# Altium PCB BM43112DC02_PIJIAKUN_PCB.PcbDoc
Units mm, origin at the board's own origin, x right, y up, seen from the top; angles counter-clockwise.
Board outline 16.36 x 15.97 mm, 4 copper layers (Top Layer 1, POWER, GND, Bottom Layer 1), stack 0.745 mm thick; 65 components, 36 nets, 235 pads, 55 vias.
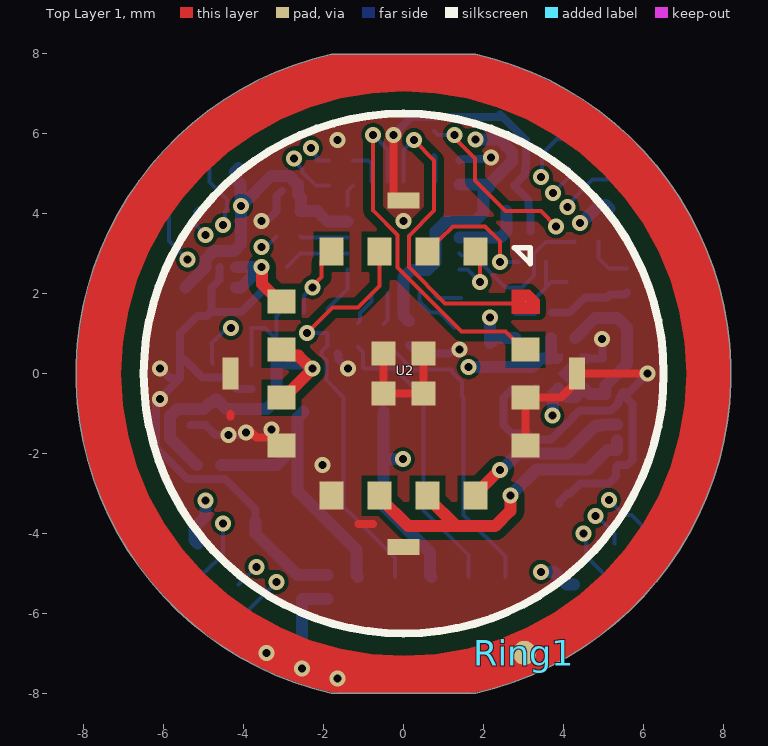
[diagram p0: Top Layer 1 view]
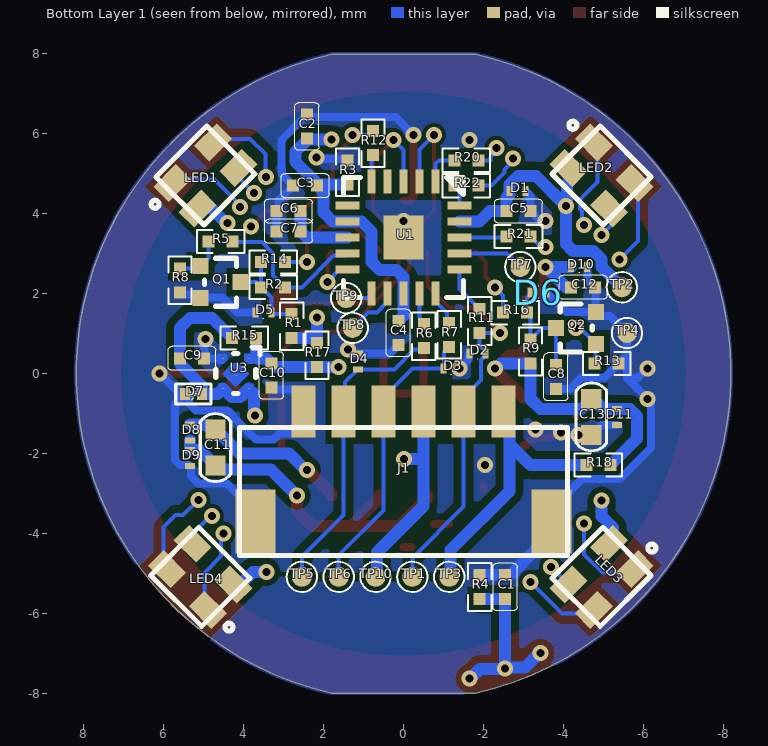
[diagram p1: Bottom Layer 1 view, seen from below]
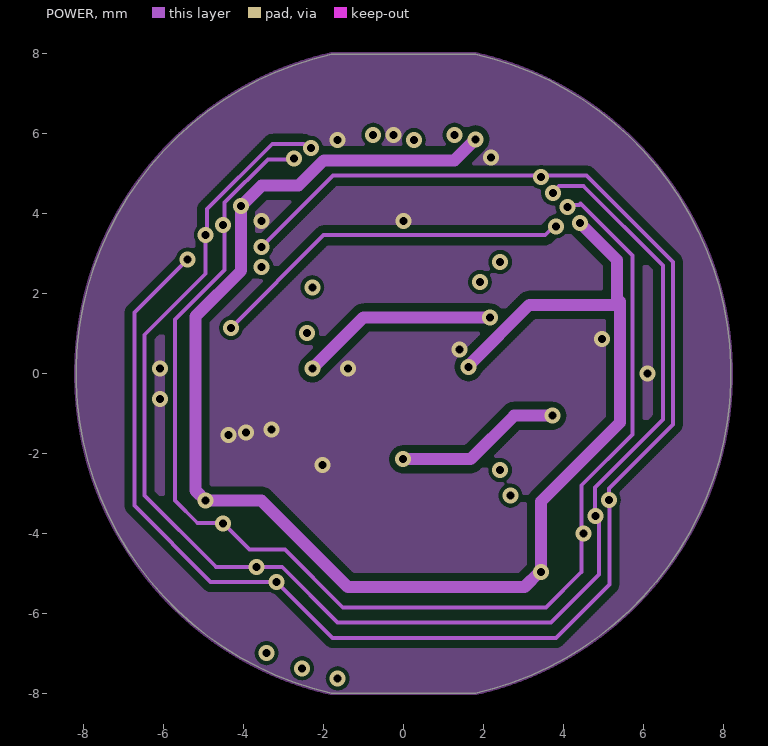
[diagram p2: POWER]
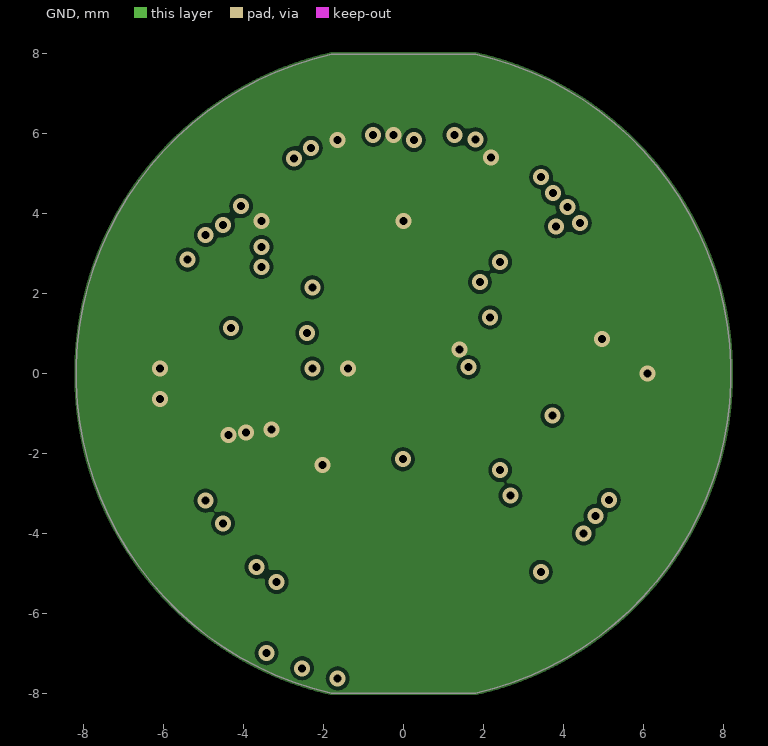
[diagram p3: GND]
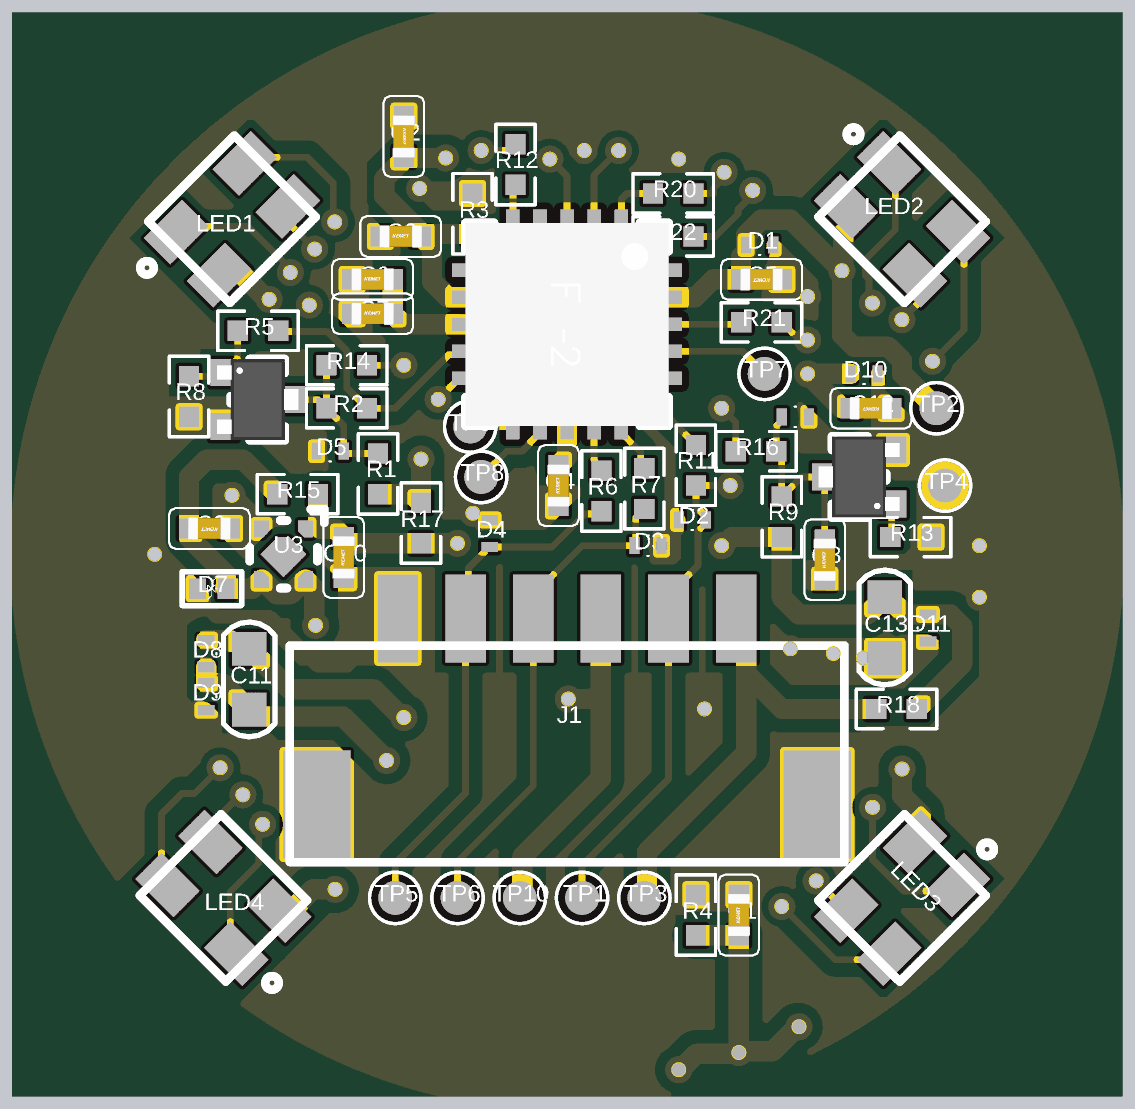
[diagram p4: 3D render of the assembled board from below, using the file's embedded part models]

## Layer stack, top to bottom
Top Solder: solder mask 0.0102, Solder Resist, Dk 3.5
Top Layer 1: signal copper 0.035
Dielectric 2: prepreg 0.0711, PP-006, Dk 4.1
POWER: signal copper 0.035
Dielectric 3: prepreg 0.0711, PP-006, Dk 4.1
Dielectric 1: dielectric 0.32, FR-4, Dk 4.8
Dielectric 4: prepreg 0.0711, PP-006, Dk 4.1
GND: signal copper 0.035
Dielectric 5: prepreg 0.0711, PP-006, Dk 4.1
Bottom Layer 1: signal copper 0.035
Bottom Solder: solder mask 0.0102, Solder Resist, Dk 3.5

## Board outline
-1.803,-7.987 cw(c-0.001,0) -1.803,7.987 1.794,7.987 cw(c-0.008,0) 1.794,-7.987

## Design rules (kind name [scope] priority, off if disabled: settings)
BoardOutlineClearance [All] p1: gap=0 ignorepadtopadclearanceinfootprint=FALSE
Clearance [All] p1: gap=0.1 ignorepadtopadclearanceinfootprint=FALSE except(0.15: SMDPad-Fill SMDPad-Poly SMDPad-Region; 0.2: Arc-Fill Arc-Poly Arc-Region Track-Fill Track-Poly Track-Region; 0.5: Fill-Fill Fill-Poly Fill-Region Poly-Poly Poly-Region Region-Region)
HoleToHoleClearance [All] p1: gap=0 allowstackedmicrovias=TRUE
MinimumSolderMaskSliver [All] p1: minsoldermaskwidth=0
PolygonConnect [All] p1: connectstyle=Direct reliefconductorwidth=0.254 reliefentries=4 polygonreliefangle="90 Angle" airgapwidth=0
RoutingVias [All] p1: holewidth=0.711 width=1.27 viastyle="Through Hole" minholewidth=0.711 minwidth=1.27 maxholewidth=0.711 maxwidth=1.27
SilkToSilkClearance SilkToSilkClearance_1 [All] p1: silktosilkclearance=0
SilkToSolderMaskClearance [IsPad] p1: minsilkscreentomaskgap=0 clearancetoexposedcopper=TRUE
SolderMaskExpansion [All] p1: expansion=0.102 istentingtop=FALSE
Width [All] p1: maxlimit=1 minlimit=0.1 preferedwidth=0.1
26 further rules are at their usual default settings.

## Components (designator, comment, footprint, x,y, rotation, side; value= is the part's Value field where it differs from the comment)
C1 "2.2nF,25V,10%,村田" C0201 -2.54,-5.334 r90 bottom
C2 "2.2uF,10V,20%,太诱" C0201 2.413,6.177 r270 bottom
C3 "0.1uF,16V,10%,村田" C0201 2.459,4.699 r180 bottom
C4 "0.1uF,16V,10%,村田" C0201 0.127,1.016 r90 bottom
C5 "0.1uF,16V,10%,村田" C0201 -2.875,4.064 r0 bottom
C6 "2.2uF,10V,20%,太诱" C0201 2.875,4.064 r180 bottom
C7 "0.1uF,16V,10%,村田" C0201 2.875,3.556 r180 bottom
C8 "47nF,16V,10%,村田" C0201 -3.81,-0.081 r90 bottom
C9 "2.2uF,10V,20%,太诱" C0201 5.288,0.381 r0 bottom
C10 "0.1uF,16V,10%,村田" C0201 3.302,-0.046 r90 bottom
C11 "2.2uF,10V,20%,太诱" CC0402-M 4.699,-1.847 r270 bottom
C12 "2.2nF,25V,10%,村田" C0201 -4.491,2.159 r0 bottom
C13 "2.2uF,10V,20%,太诱" CC0402-M -4.699,-1.085 r90 bottom
D1 "PT4CR3V3NE" SOD-962 -2.848,4.572 r0 bottom
D2 "PT4CR3V3NE" SOD-962 -1.851,0.508 r180 bottom
D3 "PT4CR3V3NE" SOD-962 -1.197,0.127 r0 bottom
D4 "PT4CR3V3NE" SOD-962 1.143,0.308 r270 bottom
D5 "PT4CR3V3NE" SOD-962 3.502,1.524 r180 bottom
D6 "PT4CR3V3NE" SOD-962 -3.375,2.032 r0 bottom
D7 "PT4C051V" "DFN0603-2L 0.3*0.23 Pitch 0.38" 5.251,-0.508 r180 bottom
D8 "PT4CR3V3NE" SOD-962 5.334,-1.47 r270 bottom
D9 "PT4C121V" SOD-962 5.334,-2.105 r270 bottom
D10 "PT4C121V" SOD-962 -4.391,2.667 r180 bottom
D11 "PT4CR3V3NE" SOD-962 -5.334,-1.089 r90 bottom
J1 "Connector 6 Pins" CON6_10 0,-0.95 r0 bottom locked
LED1 "TZL-13-063RGB/NC" S1615RGB 4.953,4.953 r315 bottom
LED2 "TZL-13-063RGB/NC" S1615RGB -4.953,4.953 r45 bottom
LED3 "TZL-13-063RGB/NC" S1615RGB -4.953,-5.08 r135 bottom
LED4 "TZL-13-063RGB/NC" S1615RGB 5.08,-5.08 r225 bottom
Q1 "SXSC568R//NC" SOT-723 4.572,2.286 r270 bottom
Q2 "SXSC568R" SOT-723 -4.318,1.143 r90 bottom
R1 "10KΩ,5%" R0201 2.794,1.189 r270 bottom
R2 "100Ω,5%" R0201 3.256,2.159 r0 bottom
R3 "10KΩ,5%" R0201 1.397,5.034 r270 bottom
R4 "0Ω,5%" R0201 -1.905,-5.334 r270 bottom
R5 "2.2KΩ,5%//NC" R0201 4.569,3.304 r0 bottom
R6 "100Ω,5%" R0201 -0.508,0.935 r90 bottom
R7 "100Ω,5%" R0201 -1.143,0.97 r90 bottom
R8 "10KΩ,5%//NC" R0201 5.588,2.332 r270 bottom
R9 "10KΩ,5%" R0201 -3.175,0.554 r270 bottom
R11 "330Ω,5%" R0201 -1.905,1.316 r90 bottom
R12 "2.2KΩ,5%" R0201 0.762,5.761 r90 bottom
R13 "10KΩ,5%" R0201 -5.08,0.254 r180 bottom
R14 "1KΩ,5%" R0201 3.256,2.794 r0 bottom
R15 "0Ω,5%//NC" R0201 3.983,0.889 r180 bottom
R16 "1KΩ,5%" R0201 -2.794,1.524 r180 bottom
R17 "0Ω,5%//NC" R0201 2.159,0.462 r90 bottom
R18 "0Ω,5%" R0201 -4.872,-2.286 r180 bottom
R20 "47R/NC" R0201 -1.57,5.334 r180 bottom
R21 "47R/NC" R0201 -2.875,3.429 r0 bottom
R22 "100R/NC" R0201 -1.57,4.699 r0 bottom
Ring1 "Ring" Ring 0,0 r0 top locked
TP1 "TP" TP（Φ0.5） -0.222,-5.08 r90 bottom
TP2 "TP" TP（Φ0.5） -5.461,2.159 r90 bottom
TP3 "TP" TP（Φ0.5） -1.143,-5.08 r90 bottom
TP4 "TP" TP（Φ0.5） -5.588,1.016 r90 bottom
TP5 "TP" TP（Φ0.5） 2.54,-5.08 r90 bottom
TP6 "TP" TP（Φ0.5） 1.619,-5.08 r90 bottom
TP7 "TP" TP（Φ0.5） -2.921,2.667 r90 bottom
TP8 "TP" TP（Φ0.5） 1.27,1.143 r90 bottom
TP9 "TP" TP（Φ0.5） 1.432,1.889 r90 bottom
TP10 "TP" TP（Φ0.5） 0.699,-5.08 r90 bottom
U1 "ACM32FP421FIU6" "QFN 20 3*3 Pitch 0.4" 0,3.4 r270 bottom
U2 "BF83112DW7&D_7&F_4" BF83112DW7&D_7&F_4 0,0 r0 top locked
U3 "LP3997-33QVF" "DFN 1*1-4L" 4.191,0 r0 bottom

## Footprints (in the part's own frame and the unit in brackets; to place one, negate y for a bottom-side part, rotate by r counter-clockwise, add the part's x,y. Pads: shape width x height; smd on the part's side, far side on the other; paste and mask are expansions set on the pad)
BF83112DW7&D_7&F_4 [mm]
  round 0.025 smd: 1(3.05,1.8)
  rect 0.7x0.6 smd: 2(3.05,0.6) 3(3.05,-0.6) 4(3.05,-1.8) 9(-3.05,-1.8) 10(-3.05,-0.6) 11(-3.05,0.6) 12(-3.05,1.8)
  rect 0.6x0.7 smd: 5(1.8,-3.05) 6(0.6,-3.05) 7(-0.6,-3.05) 8(-1.8,-3.05) 13(-1.8,3.05) 14(-0.6,3.05) 15(0.6,3.05) 16(1.8,3.05)
  rect 0.6x0.6 smd: 17(0.5,0.5) 18(0.5,-0.5) 19(-0.5,0.5) 20(-0.5,-0.5)
  rect 0.4x0.8 smd: 21(4.33,0) 23(-4.33,0)
  rect 0.8x0.4 smd: 22(0,-4.33) 24(0,4.33)
  round 0.1 on Mech13: ""(0.15,0.15)
  Top Layer 1 region: 2.7,1.5 2.7,2.1 3.15,2.1 3.4,1.85 3.4,1.5
  silkscreen extent -6.5,-6.5 6.5,6.5
C0201 [mm]
  rect 0.3x0.3 smd mask+0.051: 1(-0.3,0) 2(0.3,0)
  round 0.05 on Mech15: ""(0,0)
  silkscreen extent -0.6,-0.3 0.6,0.3, body extent -0.31,-0.17 0.32,0.16, height 0.37
CC0402-M [mm]
  rect 0.5x0.51 smd mask+0.051: 1(-0.45,0) 2(0.45,0)
  silkscreen extent -0.85,-0.38 0.85,0.38
CON6_10 [mm]
  rect 0.6x1.3 smd mask+0.051: 1(2.5,0) 2(1.5,0) 3(0.5,0) 4(-0.5,0) 5(-1.5,0) 6(-2.5,0)
  rect 1x1.6 smd mask+0.051: A(-3.7,2.75) B(3.7,2.75)
  silkscreen extent -4.1,0.4 4.1,3.6
"DFN0603-2L 0.3*0.23 Pitch 0.38" [mm]
  rect 0.25x0.3 smd mask+0.051: 1(-0.21,0) 2(0.21,0)
  silkscreen extent -0.44,-0.25 0.44,0.25
"DFN 1*1-4L" [mm]
  round 0.025 smd mask+0.051: 1(-0.325,-0.375) 2(0.325,-0.375) 3(0.325,0.375) 4(-0.325,0.375) A(0,0.042)
  round 0.05 on Mech15: ""(0,0)
  Top Layer 1 region: 0.302,0.25 0.215,0.337 0.215,0.5 0.435,0.5 0.435,0.25
  Top Layer 1 region: -0.435,-0.5 -0.215,-0.5 -0.215,-0.337 -0.302,-0.25 -0.435,-0.25
  Top Layer 1 region: -0.435,0.25 -0.302,0.25 -0.215,0.337 -0.215,0.5 -0.435,0.5
  Top Layer 1 region: 0.215,-0.5 0.215,-0.337 0.302,-0.25 0.435,-0.25 0.435,-0.5
  Top Layer 1 region: -0.085,-0.255 -0.339,0 0,0.339 0.339,0 0.085,-0.255
  silkscreen extent -0.6,-0.67 0.5,0.5, body extent -0.5,-0.5 0.5,0.5, height 0.59
"QFN 20 3*3 Pitch 0.4" [mm]
  rect 0.6x0.2 smd: 1(-1.4,0.8) 2(-1.4,0.4) 3(-1.4,0) 4(-1.4,-0.4) 5(-1.4,-0.8) 11(1.4,-0.8) 12(1.4,-0.4) 13(1.4,0) 14(1.4,0.4) 15(1.4,0.8)
  rect 0.2x0.6 smd: 6(-0.8,-1.4) 7(-0.4,-1.4) 8(0,-1.4) 9(0.4,-1.4) 10(0.8,-1.4) 16(0.8,1.4) 17(0.4,1.4) 18(0,1.4) 19(-0.4,1.4) 20(-0.8,1.4)
  rect 1.1x1 smd: A(0,0)
  round 0.1 on Mech15: ""(0,0)
  silkscreen extent -1.5,-1.5 1.5,1.5, body extent -1.5,-1.5 1.5,1.5, height 0.65
R0201 [mm]
  rect 0.3x0.3 smd mask+0.051: 1(-0.3,0) 2(0.3,0)
  round 0.05 on Mech15: ""(0,0)
  silkscreen extent -0.6,-0.29 0.6,0.29, body extent -0.3,-0.15 0.3,0.15, height 0.27
Ring [mm] "直径0.4mm"
  round 0.6 smd mask+0.102: 1(3.016,-6.98)
  Top Layer 1 region: 1.798,7.971 1.798,7.971 1.798,7.971 2.374,7.827 3.13,7.556 3.855,7.213 4.544,6.8 5.189,6.322 5.783,5.783 6.322,5.189 6.8,4.544 7.213,3.855 7.556,3.13 7.827,2.374 8.022,1.596 8.139,0.802 8.179,0 8.139,-0.802 8.022,-1.596 7.827,-2.374 7.556,-3.13 7.213,-3.855 6.8,-4.544 6.322,-5.189 5.783,-5.783 5.189,-6.322 4.544,-6.8 3.855,-7.213 3.13,-7.556 2.374,-7.827 1.798,-7.971 1.798,-7.971 1.798,-7.971 1.672,-7.98 -1.667,-7.98 -1.792,-7.971 -1.792,-7.971 -1.792,-7.971 -2.368,-7.827 -3.123,-7.556 -3.849,-7.213 -4.537,-6.8 -5.182,-6.322 -5.777,-5.783 -6.316,-5.189 -6.794,-4.544 -7.206,-3.855 -7.55,-3.13 -7.82,-2.374 -8.015,-1.596 -8.133,-0.802 -8.172,0 -8.133,0.802 -8.015,1.596 -7.82,2.374 -7.55,3.13 -7.206,3.855 -6.794,4.544 -6.316,5.189 -5.777,5.783 -5.182,6.322 -4.537,6.8 -3.849,7.213 -3.123,7.556 -2.368,7.827 -1.792,7.971 -1.792,7.971 -1.792,7.971 -1.665,7.98 1.674,7.98 hole: 0,7.057 -0.79,7.013 -1.57,6.881 -2.331,6.661 -3.062,6.359 -3.755,5.976 -4.4,5.518 -4.99,4.99 -5.518,4.4 -5.976,3.755 -6.359,3.062 -6.661,2.331 -6.881,1.57 -7.013,0.79 -7.057,0 -7.013,-0.79 -6.881,-1.57 -6.661,-2.331 -6.359,-3.062 -5.976,-3.755 -5.518,-4.4 -4.99,-4.99 -4.4,-5.518 -3.755,-5.976 -3.062,-6.359 -2.331,-6.661 -1.57,-6.881 -0.79,-7.013 0,-7.057 0.79,-7.013 1.57,-6.881 2.331,-6.661 3.062,-6.359 3.755,-5.976 4.4,-5.518 4.99,-4.99 5.518,-4.4 5.976,-3.755 6.359,-3.062 6.661,-2.331 6.881,-1.57 7.013,-0.79 7.057,0 7.013,0.79 6.881,1.57 6.661,2.331 6.359,3.062 5.976,3.755 5.518,4.4 4.99,4.99 4.4,5.518 3.755,5.976 3.062,6.359 2.331,6.661 1.57,6.881 0.79,7.013
S1615RGB [mm]
  rect 0.8x0.55 smd mask+0.051: 1(0.72,-0.45) 2(-0.72,-0.45) 3(0.72,0.45) 4(-0.72,0.45)
  silkscreen extent -0.9,-0.85 1.5,0.85
SOD-962 [mm] "类似0201"
  rect 0.15x0.25 smd mask+0.051: 1(-0.2,0) 2(0.2,0)
  round 0.05 on Mech15: ""(0,0)
  silkscreen extent -0.01,-0.15 0.01,0.15, body extent -0.3,-0.15 0.3,0.15, height 0.37
SOT-723 [mm]
  rect 0.4x0.4 smd mask+0.051: 1(-0.4,-0.5) 2(0.4,-0.5) 3(0,0.5)
  round 0.1 on Mech15: ""(0,0)
  silkscreen extent -0.6,-0.4 0.6,0.4, body extent -0.6,-0.6 0.6,0.6, height 0.59
TP（Φ0.5） [mm]
  round 0.5 smd: 1(0,0)
  round 0.1 on Mech15: ""(0,0)
  silkscreen extent -0.38,-0.38 0.38,0.38

## Part data
C1 C2 C3 C4 C5 C6 C7 C8 C9 C10 C11 C12 C13: library part Cap, "贴片电容", supplier=深圳市扬盛达科技有限公司
  C1 C12: Material code=3040100000019
  C2 C6 C9 C11 C13: Material code=3040000000063
  C3 C4 C5 C7 C10: Material code=3040100000012
  C8: Material code=3040100000024
D1 D2 D3 D4 D5 D6 D7 D8 D11: library part ESD, "双向静电二极管", supplier=深圳市玛珂斯科技有限公司
  D1 D2 D3 D4 D5 D6 D8 D11: Material code=3160100000178
  D7: Material code=3160100000174
D9 D10: library part TVS, "双向瞬态抑制二极管", Material code=3160100000173, supplier=深圳市玛珂斯科技有限公司
J1: "连接器", supplier=深圳市富美康电子有限公司
LED1 LED2 LED3 LED4: library part TZL-13-063RGB, PCB DECAL=S1615RGB
Q1 Q2: library part "NPN BCE", "NPN型三极管", Material code=3160100000013, supplier=深圳市扬盛达科技有限公司
R1 R2 R3 R4 R5 R6 R7 R8 R9 R11 R12 R13 R14 R15 R16 R17 R18: library part RES, "贴片电阻", supplier=深圳市扬盛达科技有限公司
  R1 R3 R8 R9 R13: Material code=3050000000004
  R2 R6 R7: Material code=3050000000018
  R4 R15 R17 R18: Material code=3050000000061
  R5 R12: Material code=3050000000006
  R11: Material code=3050000000007
  R14 R16: Material code=3050000000003
R20 R21 R22: library part R0201, "RES S 0402 5.1Ω J 1/16W", Module=0, Part_Name="RES 0402 +-5%", Part_Number=3.0109.06100, Part_Type="Chip Resistor\General\0402\RoHS", PCB DECAL=0201, PCB_DECAL=R0603, Process=SMT, Source_Path="Z:\CULTRAVIEW CIS.OLB", Specification=spec
Ring1: "金属环", supplier=深圳市添营精密科技有限公司&东莞市飞佳五金有限公司&东莞市盟展五金科技有限公司
TP1 TP2 TP3 TP4 TP5 TP6 TP7 TP8 TP9 TP10: "非正常物料无需采购", Material code=无, supplier=非正常物料线路板厂会做好的
U1: library part ACM32FP421, "微控制单元", Material code=3350000000037, supplier=上海航芯电子科技股份有限公司
U2: "电容按压式指纹识别芯片", supplier=深圳贝特莱电子科技股份有限公司
U3: library part "LDO 4 Pins", "线性稳压器", supplier=深圳市思派德科技有限公司

## Via types
v1: diameter 0.4, hole 0.2, Top Layer 1 to Bottom Layer 1, tented both sides, 55 vias

## Nets (pads, with @x,y where several pads share a name; then routed paths per layer and width w, separated by ;. In a path a pad name is that pad's centre, name@x,y a point inside that pad or via, vN(x,y) a via of type N, cw(c..) or ccw(c..) an arc to the next point about the centre after c; other vN are vias at no path point)
5V: C9.2 D7.2 J1.4 R15.1 TP10.1 U3.3 U3.4 | length 14.9
  POWER w0.3: v1(-0.019,-2.14) 1.67,-2.14 2.759,-1.051 v1(3.718,-1.051)
  Bottom Layer 1 w0.3: J1.4 -0.5,-2.13 ; v1(-0.019,-2.14) -0.34,-2.14 -0.35,-2.13 -0.5,-2.13 ; TP10.1 0.66,-5.042 0.66,-4.47 -0.5,-3.31 -0.5,-2.13 ; v1(3.718,-1.051) 3.737,-1.032 3.737,-0.504 U3.4 ; 3.901,-0.403 4.087,-0.589 4.295,-0.589 4.509,-0.375 U3.3 4.649,-0.508 D7.2 5.041,-0.299 5.588,0.248 5.588,1.143 5.334,1.397 4.791,1.397 R15.1
BOOT: TP7.1 U1.17 | length 1.7
  Bottom Layer 1 w0.1: TP7.1 -2.588,3 U1.17
ESD-GND: C1.1 R4.2 Ring1.1 | length 4.4
  Bottom Layer 1 w0.3: v1(-3.429,-6.985) -3.402,-6.985 -3.04,-7.347 -2.559,-7.347 v1(-2.54,-7.366) ; R4.2 C1.1 v1(-2.54,-7.366) ; v1(-1.651,-7.62) -1.678,-7.62 -1.913,-7.385 -2.521,-7.385 v1(-2.54,-7.366)
FP_INT: D2.2 J1.5 R11.1 TP1.1 U2.14 | length 10.6
  Top Layer 1 w0.1: v1(-2.413,1.016) -1.778,1.651 -1.143,1.651 -0.6,2.194 U2.14
  Bottom Layer 1 w0.1: v1(-2.413,1.016) R11.1 -1.905,0.704 -2.051,0.558 -2.051,0.458 -1.936,0.343 -1.936,-0.164 -1.5,-0.6 J1.5 -1.5,-3.326 -0.222,-4.604 TP1.1
FVDD: C11.1 D8.1 U2.5 | length 4.3
  Top Layer 1 w0.3: U2.5 1.8,-3 2.387,-2.413 v1(2.413,-2.413)
  Bottom Layer 1 w0.3: v1(2.413,-2.413) 2.44,-2.413 2.856,-1.997 4.094,-1.997 4.694,-1.397 C11.1 4.799,-1.297 4.953,-1.297 4.98,-1.27 D8.1
FVSS: C11.2 D8.2 D9.1 U2.6 U2.7 | length 8.6
  Top Layer 1 w0.3: U2.7 -0.6,-3.1 0.11,-3.81 1.31,-3.81 ; U2.6 0.6,-3.1 1.31,-3.81 ; v1(2.667,-3.048) 2.667,-3.429 2.286,-3.81 1.31,-3.81
  Bottom Layer 1 w0.3: v1(2.667,-3.048) 3.318,-2.397 4.604,-2.397 5.096,-1.905 D9.1 D8.2
GND: C1.2 C2.1 C3.1 C4.1 C5.1 C6.1 C7.1 C8.1 C9.1 C10.1 C12.1 C13.1 D1.1 D2.1 D3.1 D4.1 D5.1 D6.1 D7.1 D9.2 D10.2 D11.1 J1.1 J1.A J1.B Q1.2 Q2.2 R3.1 R4.1 R8.2 R13.2 TP4.1 U1.A U2.3 U2.4 U2.8 U2.9 U2.17 U2.18 U2.19 U2.20 U2.21 U2.22 U2.23 U2.24 U3.2 | length 51.8
  Top Layer 1 w0.2: -4.33,-1.004 -4.327,-1.007 -4.327,-1.076 ; v1@-3.937,-1.397 -3.883,-1.397 -3.68,-1.6 -3.25,-1.6 U2.9 U2.9@-3,-1.8 ; U2.8@-2,-2.9 U2.8@-2,-2.8 ; -1.135,-3.765 -0.765,-3.765 ; U2.19 U2.20 U2.18 U2.17 ; v1(-0.254,5.969) -0.254,4.43 -0.154,4.33 U2.24 ; U2.22@-0.2,-4.33 U2.22 ; U2.4 U2.3 3.93,-0.6 4.33,-0.2 U2.21 v1(6.096,0)
  Bottom Layer 1 w0.2: v1(-6.096,0.127) -5.858,-0.111 -5.588,-0.111 ; D11.1 -4.95,-1.289 -4.704,-1.535 C13.1 -4.06,-1.535 -3.991,-1.466 v1(-3.937,-1.466) ; D10.2 -4.603,2.655 -4.603,2.347 C12.1 -4.805,2.145 -4.805,1.557 Q2.2 ; C8.1 -4.165,-0.381 -4.45,-0.096 -5.03,-0.096 R13.2 -5.588,0.462 ; J1.A -3.7,-3.4 -4.464,-2.636 -5.405,-2.636 -6.192,-1.849 -6.192,-0.715 -5.588,-0.111 ; D6.1 -4.064,1.543 Q2.2 ; v1(-3.556,3.81) -3.518,3.848 -3.391,3.848 C5.1 -3.175,4.445 D1.1 ; D2.1 -1.626,0.483 -1.626,0.356 v1(-1.397,0.127) ; v1(-0.254,5.969) 0.188,6.411 C2.1@2.413,6.411 ; C4.1 0.335,0.508 D4.1 1.168,0.533 1.264,0.533 1.338,0.607 v1(1.392,0.607) ; R3.1 1.434,5.371 2.141,5.371 v1(2.178,5.408) ; C2.1 3.054,5.836 3.054,5.152 3.035,5.133 3.035,4.975 C3.1 3.125,4.333 3.125,4.114 C6.1 C7.1 ; C10.1 3.248,-0.4 2.7,-0.4 2.5,-0.6 J1.1 2.5,-1.3 2.7,-1.5 3.1,-1.5 3.247,-1.647 3.687,-1.647 4.244,-1.09 4.244,-1.064 4.361,-0.947 4.387,-0.947 4.414,-0.92 5.187,-0.92 5.366,-0.741 5.366,-0.678 5.391,-0.653 5.391,-0.603 5.436,-0.558 5.436,-0.533 D7.1 5.461,-0.483 5.486,-0.458 5.638,-0.458 v1(6.096,0) ; D5.1 4.147,1.524 4.528,1.905 5.053,1.905 Q1.2 5.168,1.982 5.538,1.982 R8.2 ; J1.B@3.9,-3.259 3.9,-3.2 4.1,-3 4.159,-3 4.412,-2.747 5.127,-2.747 5.309,-2.565 5.309,-2.33 D9.2 ; U3.2 4.522,0.381 C9.1 4.971,0.399 4.971,0.854 v1(4.953,0.871) ; D9.2@5.319,-2.32 5.359,-2.28 5.594,-2.28 5.715,-2.159 5.715,-0.762 5.511,-0.558 5.486,-0.558 D7.1@5.461,-0.533 ; -5.588,-0.111 -5.588,0.462 ; -5.588,0.462 TP4.1 -5.161,1.443 -4.918,1.443 Q2.2
  Bottom Layer 1 w0.3: J1.A -3.7,-4 -2.666,-5.034 C1.2 R4.1
  other v1: -2.032,-2.286 -4.38,-1.535 -3.302,-1.397 -6.096,-0.635 0,3.81 -1.651,5.842
HVDD: C12.2 D10.1 U2.12 | length 2.6
  Top Layer 1 w0.3: v1(-3.556,2.667) -3.537,2.648 -3.537,2.237 -3.1,1.8 U2.12
  Bottom Layer 1 w0.3: C12.2 -4.064,2.159 v1(-3.556,2.667) D10.1
INT: R11.2 U1.16 | length 1.2
  Bottom Layer 1 w0.1: R11.2 -1.4,2.121 U1.16
LED_B: R20.1 U1.1 | length 1
  Bottom Layer 1 w0.1: R20.1 -0.889,5.334 -0.805,5.25 -0.805,4.805 U1.1
LED_G: R21.2 U1.18 | length 1.2
  Bottom Layer 1 w0.1: R21.2 -2.546,3.4 U1.18
LED_R: R22.2 U1.20 | length 0.6
  Bottom Layer 1 w0.1: U1.20 -1.4,4.569 R22.2
MCU3_3V: C2.2 C3.2 C4.2 C5.2 C10.2 D1.2 LED1.3 LED2.3 LED3.3 LED4.3 R3.2 R15.2 R17.1 TP2.1 U1.7 U1.13 U1.19 U3.1 | length 59.7
  POWER w0.3: v1(1.621,0.162) 1.621,0.189 1.671,0.239 1.671,0.249 3.142,1.72 5.334,1.72 ; v1(1.794,5.858) 1.27,5.334 -1.998,5.334 -2.633,4.699 -3.556,4.699 v1(-4.064,4.191) -4.064,2.575 -5.207,1.432 -5.207,-2.921 v1(-4.953,-3.175) -3.556,-3.175 -1.397,-5.334 3.021,-5.334 3.402,-4.953 v1(3.429,-4.953) 3.429,-3.201 5.403,-1.227 5.403,1.8 5.334,1.869 5.334,2.839 v1(4.404,3.769)
  Bottom Layer 1 w0.3: TP2.1 -4.953,2.667 -4.953,2.859 -4.745,3.067 -4.24,3.067 -4.064,3.243 v1(-4.064,4.191) ; LED3.3 -5.232,-4.164 -5.232,-3.846 -4.953,-3.567 v1(-4.953,-3.175) ; LED2.3 -4.214,5.056 -4.214,4.879 -4.083,4.748 -4.083,4.21 v1(-4.064,4.191) ; U1.19 -1.895,3.8 -2.159,4.064 C5.2 -2.573,4.066 -2.573,4.403 -2.648,4.478 D1.2 -2.648,4.726 -2.869,4.947 -3.308,4.947 v1(-4.064,4.191) ; C4.2 0,1.443 U1.13 0,2.412 0.176,2.587 0.591,2.587 0.794,2.79 0.794,3.547 1.046,3.8 U1.7 1.764,3.8 1.997,4.033 1.997,4.537 C3.2 ; R3.2 2.124,4.734 C3.2 ; v1(1.621,0.162) R17.1 3.21,0.162 C10.2 3.423,0.375 3.645,0.375 3.683,0.413 R15.2 ; v1(1.794,5.858) 2.394,5.858 C2.2 2.413,5.837 2.704,5.546 2.704,5.297 2.159,4.753 C3.2 ; v1(3.429,-4.953) 3.758,-4.953 4.076,-5.271 LED4.3 ; v1(4.404,3.769) 4.423,3.788 4.456,3.788 4.881,4.212 4.879,4.214 5.056,4.214 LED1.3
NetLED1_1: LED1.1 LED2.1 LED3.1 LED4.1 R22.1 | length 42.5
  POWER w0.1: v1(-4.517,-3.741) -5.15,-3.74 -5.715,-3.175 -5.715,1.348 -4.476,2.587 -4.476,3.675 v1(-4.514,3.713) ; v1@-4.515,-3.74 -3.856,-4.399 -2.967,-4.399 -1.524,-5.842 3.556,-5.842 4.445,-4.953 v1@4.445,-3.992 ; v1@-4.476,3.713 -4.476,4.274 -3.398,5.352 -2.771,5.352 v1(-2.744,5.379) ; v1(4.091,4.165) 4.149,4.222 4.393,4.222 4.419,4.248 5.715,2.953 5.715,-1.518 4.443,-2.791 4.443,-3.935 4.473,-3.965 v1(4.5,-3.992)
  Bottom Layer 1 w0.1: LED3.1 -5.692,-4.977 -4.977,-4.977 -4.517,-4.517 v1(-4.517,-3.741) ; LED2.1 -4.85,5.692 -4.85,4.795 -4.414,4.358 -4.414,4.113 -4.464,4.063 -4.464,3.763 v1(-4.514,3.713) ; v1(-2.744,5.379) -2.744,5.317 -2.528,5.1 -2.528,5.03 -2.197,4.699 R22.1 ; v1(4.091,4.165) 4.091,4.218 4.723,4.85 5.692,4.85 LED1.1 ; v1(4.5,-3.992) 4.557,-4.049 4.557,-4.565 4.977,-4.985 4.977,-5.819 LED4.1
NetLED1_2: LED1.2 LED2.2 LED3.2 LED4.2 R21.1 | length 50.1
  POWER w0.1: v1(-5.403,2.853) -6.731,1.525 -6.731,-3.302 -4.826,-5.207 v1(-3.175,-5.207) -1.778,-6.604 3.81,-6.604 5.143,-5.271 5.143,-3.17 v1(5.129,-3.156) 5.134,-3.151 5.134,-2.867 6.731,-1.27 6.731,2.794 4.572,4.953 v1@3.435,4.953 ; v1(-3.556,3.167) -1.77,4.953 3.395,4.953 v1(3.435,4.914)
  Bottom Layer 1 w0.1: LED2.2 -5.869,4.674 -5.869,3.319 v1(-5.403,2.853) ; LED3.2 -4.674,-5.996 -3.964,-5.996 v1(-3.175,-5.207) ; v1(-3.556,3.167) -3.499,3.224 -3.38,3.224 R21.1 ; v1(3.435,4.914) 3.455,4.934 3.455,5.487 3.837,5.869 4.674,5.869 LED1.2 ; v1(5.129,-3.156) 5.507,-3.535 5.694,-3.535 5.996,-3.837 5.996,-4.801 LED4.2
NetLED1_4: LED1.4 LED2.4 LED3.4 LED4.4 R20.2 | length 40.3
  POWER w0.1: v1(-4.949,3.468) -4.949,2.499 -6.477,0.972 -6.477,-3.048 -4.697,-4.828 v1(-3.683,-4.828) -3.046,-4.828 -1.651,-6.223 3.683,-6.223 4.88,-5.026 4.88,-3.61 v1@4.779,-3.509 ; v1@-4.922,3.468 -4.922,4.111 -3.286,5.747 -2.503,5.747 -2.403,5.647 v1(-2.322,5.647) ; v1(3.731,4.511) 3.731,4.539 3.877,4.685 4.499,4.685 6.477,2.707 6.477,-1.143 4.779,-2.841 4.779,-3.542 v1(4.793,-3.556)
  Bottom Layer 1 w0.1: LED2.4 -5.217,4.053 -5.217,3.735 v1(-4.949,3.468) ; LED3.4 v1(-3.683,-4.828) v1@-3.683,-4.826 ; v1(-2.322,5.647) -2.322,5.566 -2.17,5.414 -2.17,5.334 R20.2 ; v1(3.731,4.511) 4.126,4.906 LED1.4 ; v1(4.793,-3.556) 4.826,-3.556 5.271,-4.001 LED4.4
NetQ1_1: Q1.1 R5.2 R8.1 | length 1.2
  Bottom Layer 1 w0.1: R5.2 4.869,2.889 Q1.1 5.126,2.632 R8.1
NetQ2_1: Q2.1 R12.2 R13.1 | length 14.8
  Top Layer 1 w0.1: v1(1.269,5.97) 1.269,5.889 1.778,5.38 1.778,4.826 2.54,4.064 3.429,4.064 v1(3.81,3.683)
  POWER w0.1: v1(-4.318,1.143) -2.001,3.46 3.538,3.46 3.761,3.683 v1(3.81,3.683)
  Bottom Layer 1 w0.1: R13.1 -4.799,0.273 -4.799,0.724 Q2.1 -4.418,1.143 v1(-4.318,1.143) ; R12.2 0.853,5.97 v1(1.269,5.97)
NSS: R14.1 U2.15 | length 3.2
  Top Layer 1 w0.1: U2.15 0.6,3.1 0.85,3.35 0.9,3.35 1.233,3.683 2.032,3.683 2.413,3.302 v1(2.413,2.794)
  Bottom Layer 1 w0.1: v1(2.413,2.794) R14.1@2.875,2.794
RSTN: R16.1 U2.13 | length 1.8
  Top Layer 1 w0.1: v1(-2.286,2.159) -2.286,2.182 -2.05,2.418 -2.05,2.8 U2.13
  Bottom Layer 1 w0.1: R16.1 -2.494,1.951 v1(-2.286,2.159)
SPI_CLK: U1.10 U2.16 | length 1.4
  Top Layer 1 w0.1: U2.16 1.905,2.945 v1(1.905,2.291)
  Bottom Layer 1 w0.1: U1.10 1.6,2.6 1.905,2.295 v1(1.905,2.291)
SPI_CS_MCU: R2.1 R5.1 U1.9 | length 4
  Bottom Layer 1 w0.1: U1.9 1.45,2.95 1.749,2.95 2.54,2.159 R2.1 3.256,2.459 3.256,3.006 3.542,3.292 4.257,3.292 R5.1
SPI_MISO: U1.3 U2.1 | length 8.1
  Top Layer 1 w0.1: v1(0.254,5.842) 0.762,5.334 0.762,4.077 0.127,3.442 0.127,2.661 1.031,1.757 3.007,1.757 U2.1
  Bottom Layer 1 w0.1: U1.3 0,5.588 v1(0.254,5.842)
SPI_MOSI: U1.2 U2.2 | length 8.9
  Top Layer 1 w0.1: v1(-0.762,5.969) -0.762,4.077 -0.15,3.465 -0.15,2.655 1.448,1.057 2.543,1.057 3,0.6 U2.2
  Bottom Layer 1 w0.1: v1(-0.762,5.969) -0.4,5.607 U1.2
SPI_NSS: D5.2 Q1.3 R1.1 R2.2 R14.2 | length 2.5
  Bottom Layer 1 w0.1: R1.1 3.277,1.489 3.302,1.514 D5.2 3.302,1.905 R2.2 ; R14.2 R2.2 ; Q1.3 3.683,2.286 R2.2
SPI_RST: C8.2 D6.2 Q2.3 R9.1 R16.2 | length 2.9
  Bottom Layer 1 w0.1: C8.2 -3.81,1.135 Q2.3 -3.464,1.143 R9.1 -3.175,1.443 R16.2 -3.094,1.901 -3.175,1.982 D6.2
SPI_RST_MCU: R12.1 U1.5 | length 0.7
  Bottom Layer 1 w0.1: R12.1 0.8,5.423 U1.5
SWCK: TP9.1 U1.11 | length 0.7
  Bottom Layer 1 w0.1: U1.11 0.8,1.939 0.85,1.889 TP9.1
SWDO: TP8.1 U1.12 | length 1.3
  Bottom Layer 1 w0.1: U1.12 0.4,1.8 0.55,1.65 0.55,1.638 0.664,1.524 0.889,1.524 TP8.1
UART_RX: D4.2 J1.2 R6.1 TP5.1 | length 7.7
  Bottom Layer 1 w0.1: R6.1 -0.47,0.597 -0.267,0.597 0.223,0.108 D4.2 1.193,0.108 1.218,0.083 1.218,0.033 1.46,-0.209 1.46,-0.56 J1.2@1.495,-0.595 ; J1.2@1.5,-0.6 1.5,-3.532 2.54,-4.572 TP5.1
UART_RX1: R6.2 U1.14 | length 0.8
  Bottom Layer 1 w0.1: R6.2 -0.408,1.335 -0.408,1.386 -0.4,1.394 U1.14
UART_TX: D3.2 J1.3 R7.1 TP6.1 | length 7.3
  Bottom Layer 1 w0.1: R7.1 -1.016,0.543 -1.016,0.146 D3.2 -0.227,0.127 0.5,-0.6 J1.3 0.5,-3.421 1.619,-4.54 TP6.1
UART_TX1: R7.2 U1.15 | length 0.9
  Bottom Layer 1 w0.1: R7.2 -1.089,1.324 -1.089,1.511 -0.8,1.8 U1.15
VCC3.3V: J1.6 R18.1 TP3.1 | length 7
  Bottom Layer 1 w0.3: R18.1 -3.175,-2.286 -2.65,-1.761 ; J1.6 -2.65,-1.1 -2.65,-1.761 ; TP3.1 -1.181,-5.042 -1.181,-4.407 -2.65,-2.938 -2.65,-1.761
VCC3_3V: C13.2 D11.2 R1.2 R9.2 R17.2 R18.2 U2.10 U2.11 | length 14.8
  Top Layer 1 w0.3: U2.10 -3,-0.6 -2.286,0.114 v1(-2.286,0.127) -2.313,0.127 -2.636,0.45 -2.9,0.45 U2.11
  POWER w0.3: v1(-2.286,0.127) -1.006,1.407 v1(2.159,1.407)
  Bottom Layer 1 w0.3: R18.2 -5.842,-1.616 -5.842,-1.065 -5.666,-0.889 -4.999,-0.889 -4.845,-0.735 -4.799,-0.735 C13.2 C13.2@-4.694,-0.635 ; C13.2@-4.594,-0.74 -4.594,-0.735 C13.2@-4.694,-0.635 ; v1@-2.305,0.146 -2.332,0.146 -2.44,0.254 R9.2 -3.175,-0.635 -3.429,-0.889 -4.44,-0.889 C13.2@-4.694,-0.635 ; v1(2.159,1.407) R17.2 2.286,0.889 R1.2
VDD12: C6.2 C7.2 U1.8 | length 1.7
  Bottom Layer 1 w0.3: U1.8 2.419,3.4 C7.2 C6.2
pads on no net: C1. C2. C3. C4. C5. C6. C7. C8. C9. C10. C12. D1. D2. D3. D4. D5. D6. D8. D9. D10. D11. Q1. Q2. R1. R2. R3. R4. R5. R6. R7. R8. R9. R11. R12. R13. R14. R15. R16. R17. R18. R20. R21. R22. TP1. TP2. TP3. TP4. TP5. TP6. TP7. TP8. TP9. TP10. U1. U1.4 U1.6 U2. U3. U3.A

## Polygon pours and split planes (outlines as drawn)
GND on Top Layer 1 "GND_L01_P006" (hatched Horizontal grid 0.01 track 0.1, remove dead copper, pour order 6): -1.8,-7.987 cw(c0.002,0) -1.8,7.987 1.797,7.987 cw(c-0.005,0) 1.797,-7.987
GND on POWER "GND_L02_P007" (hatched Horizontal grid 0.01 track 0.1, remove dead copper, pour order 7): -1.803,-7.987 cw(c-0.001,0) -1.803,7.987 1.794,7.987 cw(c-0.008,0) 1.794,-7.987
GND on GND "GND_L03_P009" (hatched Horizontal grid 0.01 track 0.1, remove dead copper, pour order 9): -1.8,-7.987 cw(c0.002,0) -1.8,7.987 1.797,7.987 cw(c-0.005,0) 1.797,-7.987
GND on Bottom Layer 1 "GND_L04_P008" (hatched Horizontal grid 0.01 track 0.1, remove dead copper, pour order 8): -1.8,-7.987 cw(c0.002,0) -1.8,7.987 1.797,7.987 cw(c-0.005,0) 1.797,-7.987

## Silkscreen, mask and mechanical layers (free items; w line width, h text height)
Mechanical 1:
  circle w0.013: c-0.008,0 r7.04
  lines w0.013: -14.001,0 -2.101,0 ; -6.916,-6.914 -0.001,0 ; -6.76,6.759 -0.001,0 ; -1.051,0 1.049,0 ; -0.001,-14 -0.001,-2.1 ; -0.001,-1.05 -0.001,1.05 ; -0.001,2.1 -0.001,14 ; 2.099,0 13.999,0 ; 6.933,-6.935 -0.001,0 ; 6.963,6.964 -0.001,0 ; -1.825,-8.187 cw(c-0.001,0) -1.825,8.187 1.816,8.187 cw(c-0.008,0) 1.816,-8.187 -1.825,-8.187 ; -1.803,-7.987 cw(c-0.001,0) -1.803,7.987 1.794,7.987 cw(c-0.008,0) 1.794,-7.987 -1.803,-7.987